# Altium PCB PCB6.PcbDoc
Units mil, origin at the board's own origin, x right, y up, seen from the top; angles counter-clockwise.
Board outline 3899.71 x 3489.7 mil, 2 copper layers (Top Layer, Bottom Layer); 59 components, 49 nets, 212 pads, 44 vias.
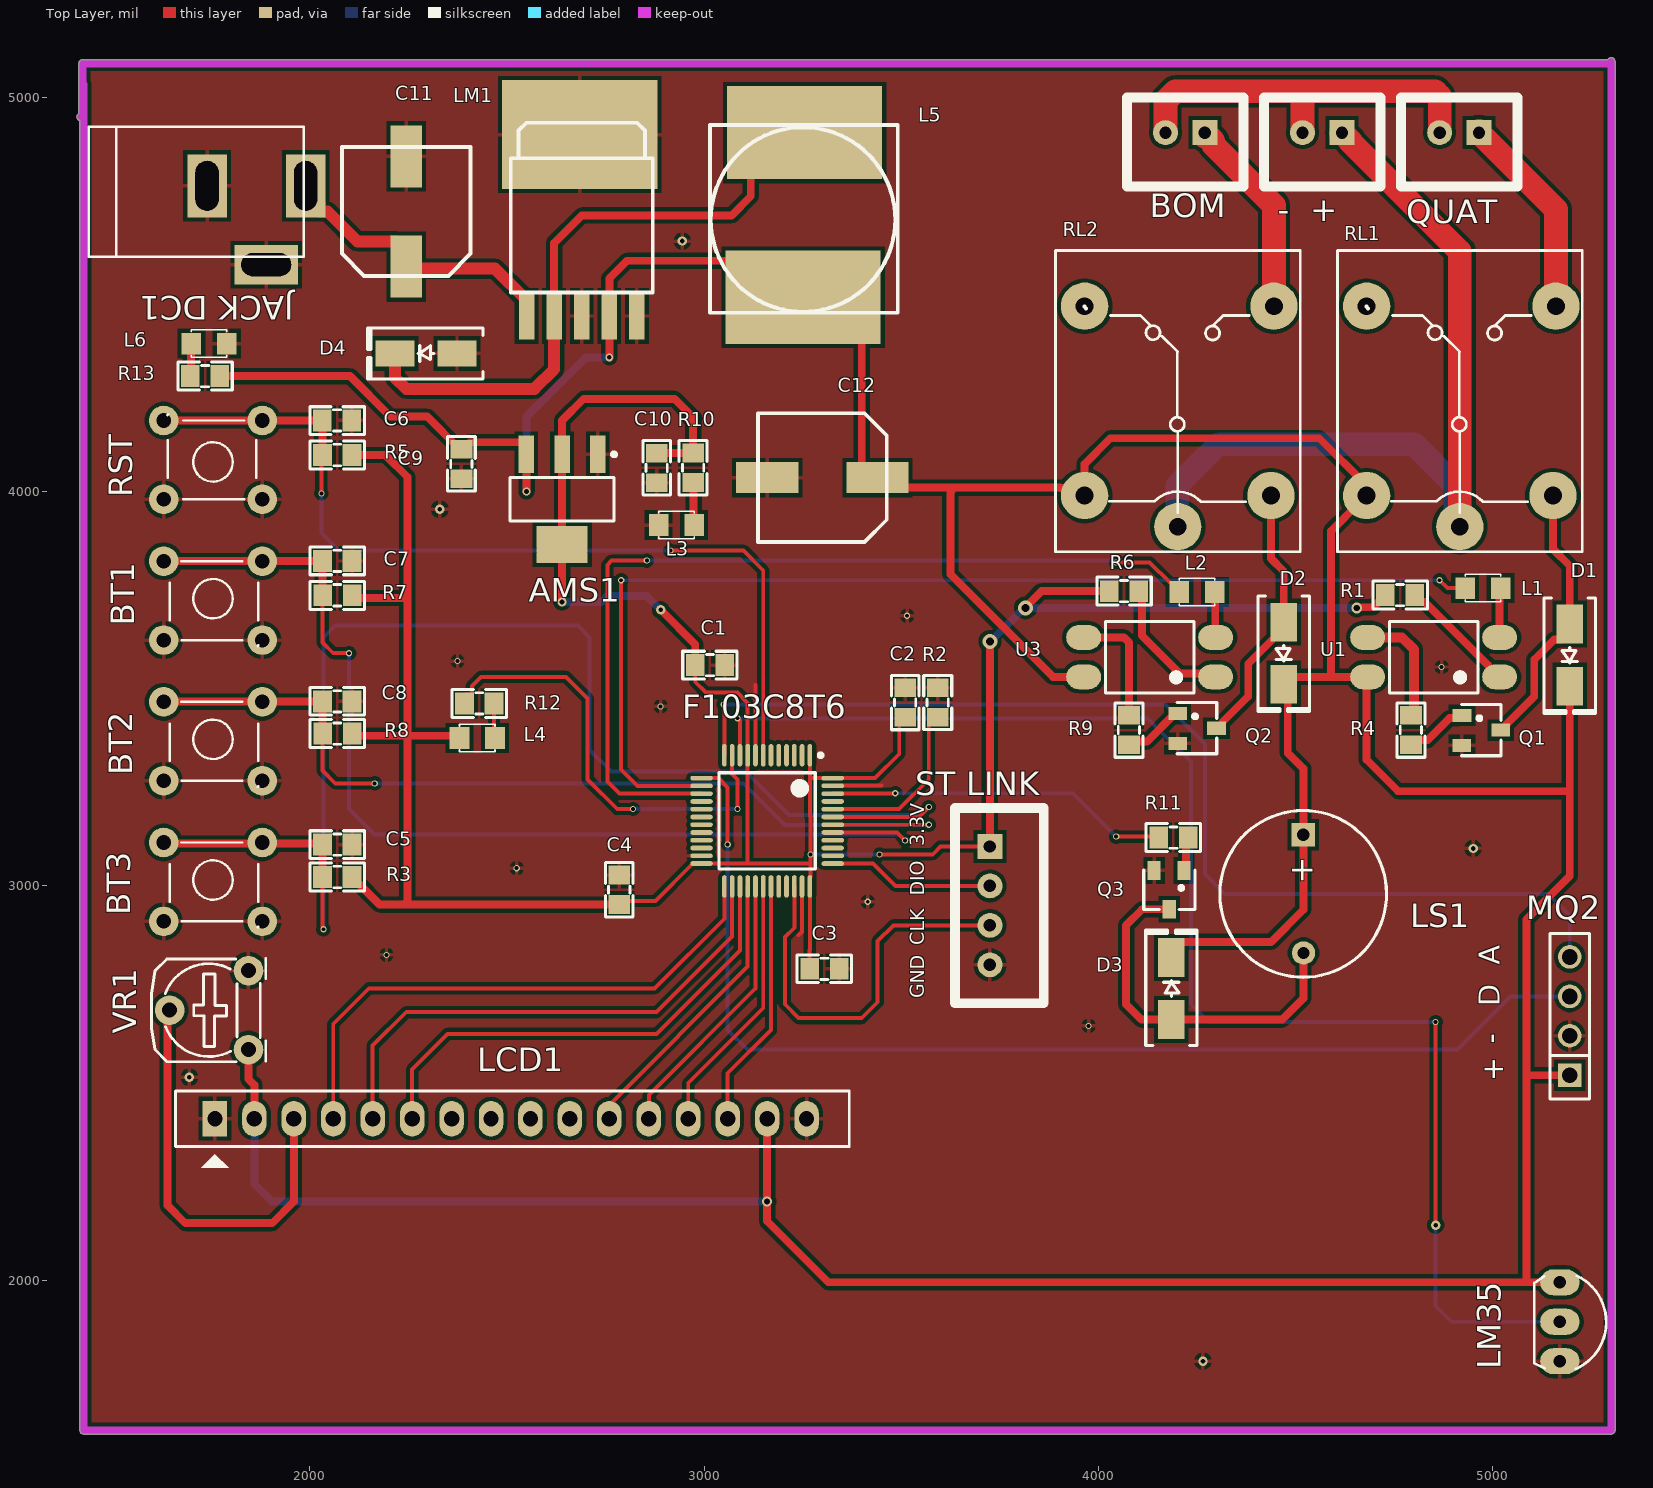
[diagram p0: Top Layer view]
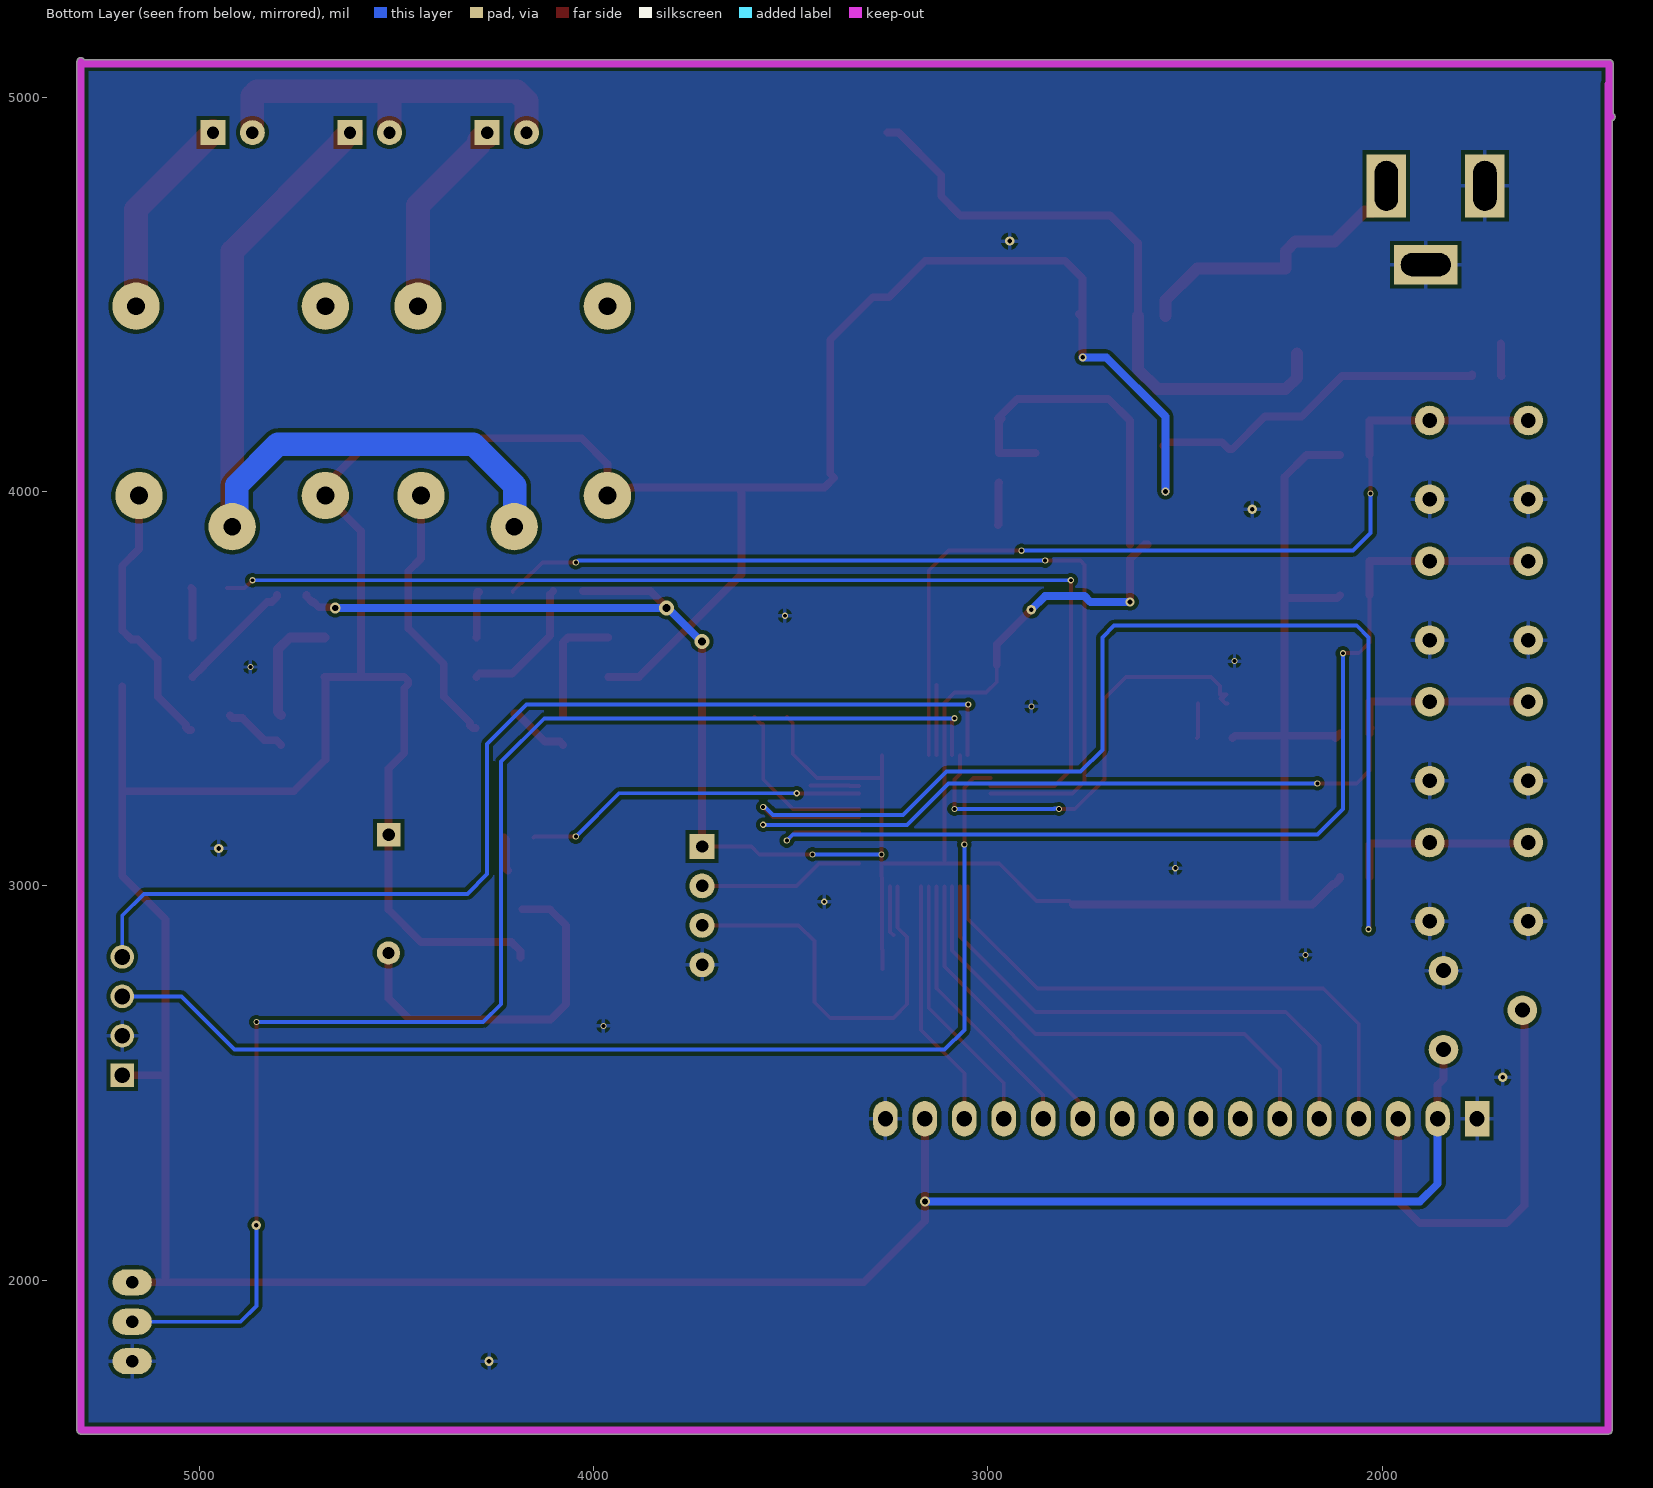
[diagram p1: Bottom Layer view, seen from below]
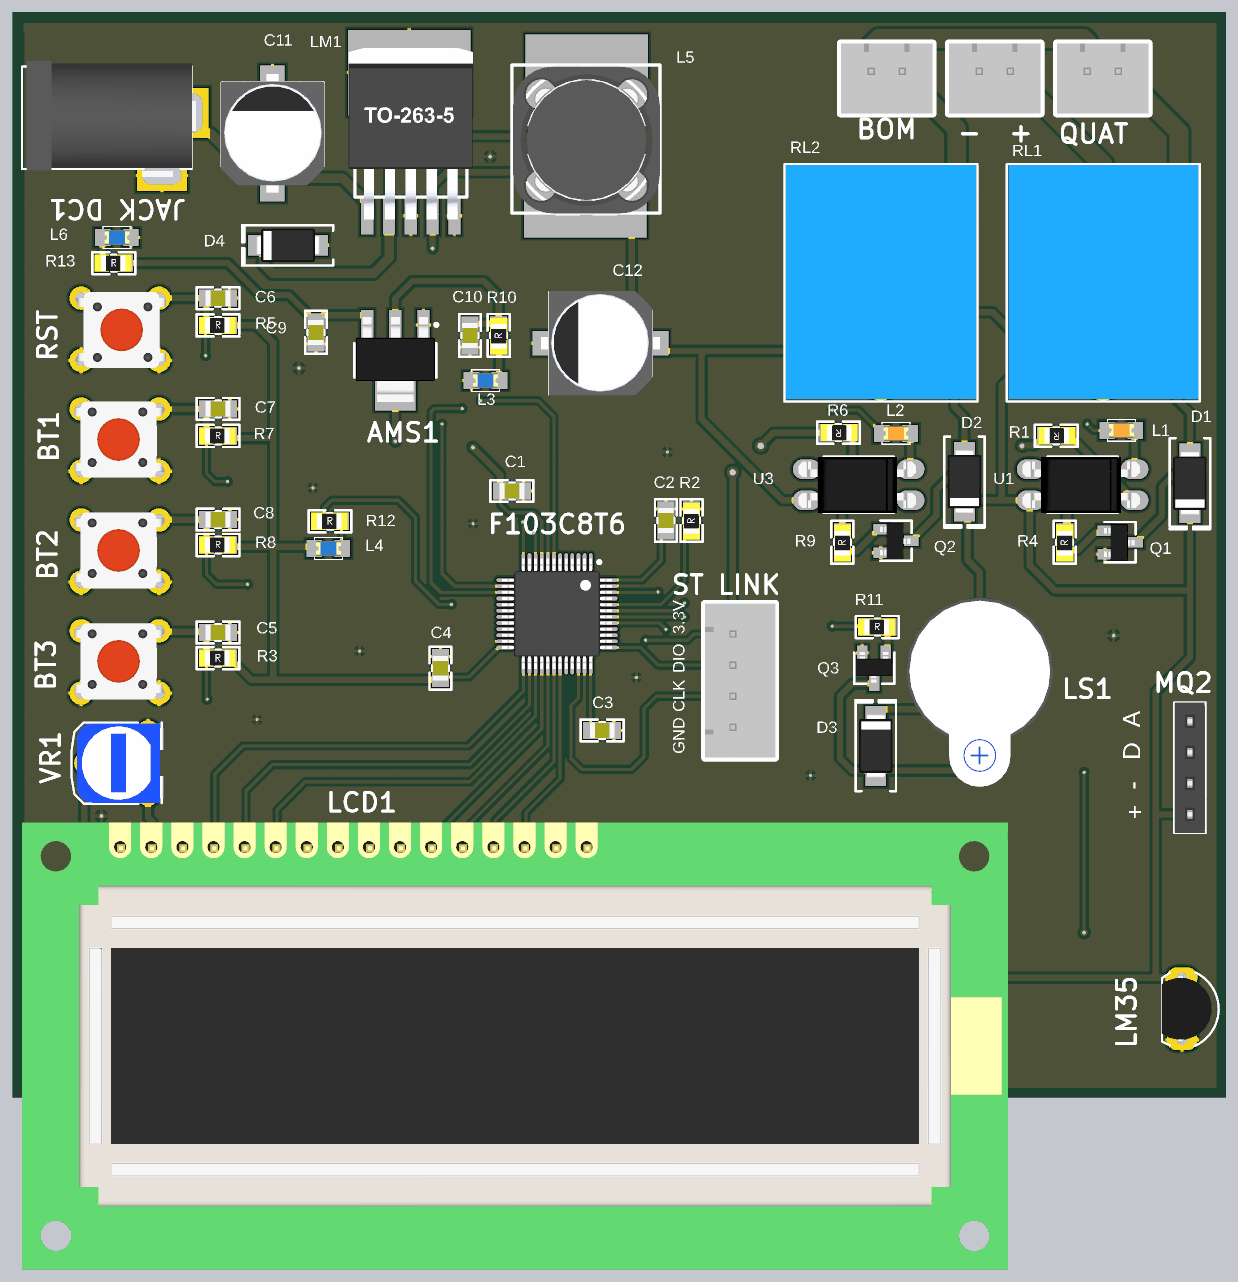
[diagram p2: 3D render of the assembled board from above, using the file's embedded part models]

## Layer stack, top to bottom
Top Solder: solder mask 0.4, Solder Resist, Dk 3.5
Top Layer: signal copper 1.4
Dielectric 1: dielectric 12.6, FR-4, Dk 4.8
Bottom Layer: signal copper 1.4
Bottom Solder: solder mask 0.4, Solder Resist, Dk 3.5

## Board outline
1417.64,4940.43 cw(c1420,4950) 1413.03,4956.97 1415.14,4959.08 1415.14,5085 cw(c1425,5085) 1425,5094.86 5290.92,5094.86 5293.04,5096.98 ccw(c5300,5090) 5293.02,5096.96 5293.03,5096.97 cw(c5300,5090) 5309.86,5090 5309.86,1620 cw(c5300,1620) 5300,1610.14 1427.5,1610.14 cw(c1427.5,1620) 1417.64,1620

## Design rules (kind name [scope] priority, off if disabled: settings)
Clearance [All] p1: gap=9.84 ignorepadtopadclearanceinfootprint=FALSE
PolygonConnect [All] p1: connectstyle=Relief reliefconductorwidth=10 reliefentries=4 polygonreliefangle="90 Angle" airgapwidth=10
RoutingVias [All] p1: holewidth=9.84 width=15.75 viastyle="Through Hole" minholewidth=9.84 minwidth=15.75 maxholewidth=9.84 maxwidth=15.75
SolderMaskExpansion [All] p1: expansion=4 istentingtop=FALSE
Width [All] p1: maxlimit=30 minlimit=10 preferedwidth=20
30 further rules are at their usual default settings.

## Components (designator, comment, footprint, x,y, rotation, side; value= is the part's Value field where it differs from the comment)
"-  +" "Header 2P 2.54 Duc Thang" XH2.54M-2 4617.5,4910 r180 top (schematic designator H7)
AMS1 "AMS1117-3.3V" SOT223 2640,3980 r180 top value="AMS1117-3.3V SOT223"
BOM "Header 2P 2.54 Duc Thang" XH2.54M-2 4270,4910 r180 top (schematic designator H8)
BT1 "SW" SW2-DIP 1630,3823.33 r0 top value="Button chip 4 pin" (schematic designator SW3)
BT2 "SW" SW2-DIP 1630,3466.67 r0 top value="Button chip 4 pin" (schematic designator SW4)
BT3 "SW" SW2-DIP 1630,3110 r0 top value="Button chip 4 pin" (schematic designator SW1)
C1 "104" "tu 0805" 3015,3560 r0 top
C2 "104" "tu 0805" 3510,3465 r90 top
C3 "104" "tu 0805" 3305,2790 r0 top
C4 "104" "tu 0805" 2785,2990 r90 top
C5 "104" "tu 0805" 2070,3105 r0 top
C6 "104" "tu 0805" 2070,4180 r180 top
C7 "104" "tu 0805" 2070,3824 r0 top
C8 "104" "tu 0805" 2070,3468 r0 top
C9 "104" "tu 0805" 2385,4070 r270 top
C10 "104" "tu 0805" 2880,4060 r270 top
C11 "470uF" "tu nhom 8 (f)" 2245,4710 r90 top
C12 "470uF" "tu nhom 8 (f)" 3300,4035 r180 top
D1 "M7" "DIODE SMA" 5195,3585 r270 top
D2 "M7" "DIODE SMA" 4470,3590 r270 top
D3 "M7" "DIODE SMA" 4185,2740 r90 top
D4 "SS34" "DIODE SMA" 2295,4350 r180 top
F103C8T6 "STM32F103xx_LQFP48" STM32_LQPF48 3160,3165 r270 top (schematic designator U2)
"JACK DC1" "JACK DC 5.5" "JACK DC 5.5" 1865,4675 r0 top value="Jac DC"
L1 "LED 0805" LED-0805-Orange 5020,3755 r180 top
L2 "LED 0805" LED-0805-Orange 4295,3745 r180 top
L3 "LED 0805" LED-0805-Blue 2975,3915 r180 top
L4 "LED 0805" LED-0805-Blue 2380,3375 r0 top
L5 "100uH - 3A SMD" "Cuon Cam 12x12x10" 3014.84,4453.31 r0 top
L6 "LED 0805" LED-0805-Blue 1700,4375 r0 top
LCD1 "LCD1602 XL" "LCD1602 with Jump" 1760,2410 r0 top locked
LM1 "LM2576 3.3V SMD" TO263-5 2690,4675 r0 top
LM35 "LM35" QTO-92 5170,1895 r270 top (schematic designator U4)
LS1 "Coi Chip Speaker" "Coi Chip Speacker" 4519.5,3130 r270 top
MQ2 "JP 1x4 2.54" "JP 1x4 CT" 5195,2520 r90 top (schematic designator JP1)
Q1 "HF" SOT-23 4970.79,3395.2 r270 top value=C9014
Q2 "HF" SOT-23 4250,3400 r270 top value=C9014
Q3 "HF" SOT-23 4180,2990 r180 top value=C9014
QUAT "Header 2P 2.54 Duc Thang" XH2.54M-2 4965,4910 r180 top (schematic designator H1)
R1 "1k" "tro smd 0805" 4765,3735 r180 top
R2 "10k" "tro smd 0805" 3590,3465 r90 top
R3 "10k" "tro smd 0805" 2069.9,3025 r0 top
R4 "1k" "tro smd 0805" 4790,3395 r90 top
R5 "10k" "tro smd 0805" 2070,4095 r0 top
R6 "1k" "tro smd 0805" 4065,3745 r180 top
R7 "10k" "tro smd 0805" 2070.1,3739.33 r0 top
R8 "10k" "tro smd 0805" 2070.1,3388.67 r0 top
R9 "1k" "tro smd 0805" 4075,3395 r90 top
R10 "330" "tro smd 0805" 2970,4060.1 r90 top
R11 "1k" "tro smd 0805" 4190,3125 r0 top
R12 "330" "tro smd 0805" 2430,3465 r0 top
R13 "330" "tro smd 0805" 1735,4295 r0 top
RL1 "Relay" "Relay 5 Chan SRD" 4916.22,3910.94 r90 top
RL2 "Relay" "Relay 5 Chan SRD" 4201.22,3910.94 r90 top
RST "SW" SW2-DIP 1880,3980 r180 top value="Button chip 4 pin" (schematic designator SW2)
"ST LINK" "Header 4P 2.54 Duc Thang" XH2.54M-4 3725,3100 r270 top (schematic designator H3)
U1 "OPTO PC817 SMD" SOP4 4850,3580 r180 top value=PC817
U3 "OPTO PC817 SMD" SOP4 4130,3580 r180 top value=PC817
VR1 "10K" "Bien Tro Tam Giac Dung" 1845,2585 r90 top

## Footprints (in the part's own frame and the unit in brackets; to place one, negate y for a bottom-side part, rotate by r counter-clockwise, add the part's x,y. Pads: shape width x height; smd on the part's side, far side on the other; paste and mask are expansions set on the pad)
"Bien Tro Tam Giac Dung" [mil] "RM065"
  round 75 hole 38: 1(0,0) 2(100,200) 3(200,0)
  silkscreen extent -31,-44 231,246, body extent -28,-50 228,228, height 279
"Coi Chip Speacker" [mm]
  rect 1.5x1.5 hole 0.8: 1(0,0)
  round 1.5 hole 0.8: 2(7.62,0.013)
  silkscreen extent -1.55,-5.38 9.18,5.36, body extent -2.22,-6 13.24,6, height 4.5
"Cuon Cam 12x12x10" [mm] "Cuon Cam 12x12x10"
  rect 10x6 smd: 1(6.1,11.6) 2(6,1)
  silkscreen extent 0,0 12.1,12.1, body extent 0.1,-0.2 12.1,12.14, height 7.51
"DIODE SMA" [mm] "SMA"
  rect 2.5x1.7 smd: 1(-2,0) 2(2,0)
  silkscreen extent -3.68,-1.65 3.75,1.65, body extent -2.6,-1.37 2.6,1.37, height 2.4
"JACK DC 5.5" [mil] "Jac DC input"
  rect 100x160 hole 59.06 slot 125.98 at 90 deg: 1(125,100) 2(-125,100)
  rect 160x100 hole 59.06 slot 125.98 at 0 deg: 3(25,-100)
  silkscreen extent -425,-80 120,250, body extent -410,-105 134,269, height 434
"JP 1x4 CT" [mm]
  rect 1.52x1.52 hole 1.02: 1(0,0)
  round 1.52 hole 1.02: 2(2.54,0) 3(5.08,0) 4(7.62,0)
  silkscreen extent -1.52,-1.27 9.14,1.27, body extent -1.52,-1.25 9.14,1.25, height 8.51
"LCD1602 with Jump" [mil] "LCD dipslay 16x2, 16 pin"
  rect 62x90 hole 39: 1(0,0)
  oval 62x90 hole 39: 2(100,0) 3(200,0) 4(300,0) 5(400,0) 6(500,0) 7(600,0) 8(700,0) 9(800,0) 10(900,0) 11(1000,0) 12(1100,0) 13(1200,0) 14(1300,0) 15(1400,0) 16(1500,0)
  silkscreen extent -100,-125 1608,70, body extent -320,-1353 2850,84, height 764
LED-0805-Blue [mil]
  rect 50x55 smd: 1(0,0) 2(90,0)
  silkscreen extent 0,-35 90,35, body extent 5,-25 85,25, height 43
LED-0805-Orange [mil]
  rect 50x55 smd: 1(0,0) 2(90,0)
  silkscreen extent 0,-35 90,35, body extent 5,-25 85,25, height 43
QTO-92 [mil] "TO-92"
  oval 66x100 hole 32: 1(-100,0) 2(0,0) 3(100,0)
  silkscreen extent -117,-65 120,118, body extent -109,-66 109,95, height 245
"Relay 5 Chan SRD" [mil] "Relay SPDT, 5 pin, 10A,W 650mil, L 800mil, H 800mil"
  round 120 hole 45: 1(0,0) 2(559.06,236.22) 3(559.06,-243.78) 4(78.74,-236.22) 5(78.74,236.22)
  silkscreen extent -63,-311 700,310, body extent -55,-306 697,304, height 602
SOP4 [mm]
  oval 2.25x1.6 smd: 1(-4.25,1.27) 2(-4.25,-1.27) 3(4.25,-1.27) 4(4.25,1.27)
  silkscreen extent -2.85,-2.3 2.85,2.3, body extent -4.67,-2.29 4.93,2.31, height 3.6
SOT223 [mm]
  rect 1x2.4 smd: 1(-2.3,-2.9) 2(0,-2.9) 3(2.3,-2.9)
  rect 3.3x2.4 smd: 4(0,2.9)
  silkscreen extent -3.48,-3.02 3.35,1.4, body extent -3.25,-3.56 3.25,3.4, height 1.68
SOT-23 [mm] "SOT 23 _ 1-3-2"
  rect 0.85x1.2 smd: 1(-0.94,-1.245) 2(0.985,-1.25) 3(0.005,1.25)
  silkscreen extent -1.65,-1.27 1.65,1.27, body extent -1.47,-1.33 1.53,1.17, height 1.06
STM32_LQPF48 [mm]
  oval 1.45x0.3 smd: 1(-4.225,2.75) 2(-4.225,2.25) 3(-4.225,1.75) 4(-4.225,1.25) 5(-4.225,0.75) 6(-4.225,0.25) 7(-4.225,-0.25) 8(-4.225,-0.75) 9(-4.225,-1.25) 10(-4.225,-1.75) 11(-4.225,-2.25) 12(-4.225,-2.75) 25(4.225,-2.75) 26(4.225,-2.25) 27(4.225,-1.75) 28(4.225,-1.25) 29(4.225,-0.75) 30(4.225,-0.25) 31(4.225,0.25) 32(4.225,0.75) 33(4.225,1.25) 34(4.225,1.75) 35(4.225,2.25) 36(4.225,2.75)
  oval 0.3x1.45 smd: 13(-2.75,-4.225) 14(-2.25,-4.225) 15(-1.75,-4.225) 16(-1.25,-4.225) 17(-0.75,-4.225) 18(-0.25,-4.225) 19(0.25,-4.225) 20(0.75,-4.225) 21(1.25,-4.225) 22(1.75,-4.225) 23(2.25,-4.225) 24(2.75,-4.225) 37(2.75,4.225) 38(2.25,4.225) 39(1.75,4.225) 40(1.25,4.225) 41(0.75,4.225) 42(0.25,4.225) 43(-0.25,4.225) 44(-0.75,4.225) 45(-1.25,4.225) 46(-1.75,4.225) 47(-2.25,4.225) 48(-2.75,4.225)
  silkscreen extent -4.35,-3.1 3.1,3.58, body extent -4.5,-4.5 4.5,4.5, height 1.6
SW2-DIP [mil] "SW button 4pin, 250 x250 mil"
  round 75 hole 37: 1(0,0) 2(0,-200) 3(250,-200) 4(250,0)
  silkscreen extent 15,-215 240,0, body extent -36,-220 276,24, height 276
TO263-5 [mil] "TO263-5"
  rect 39.37x120 smd: 1(-140,-230) 2(-70,-230) 3(0,-230) 4(70,-230) 5(140,-230)
  rect 393.7x275.59 smd: 6(-5,230)
  silkscreen extent -180,-170 180,260, body extent -200,-242 200,310, height 180
"tro smd 0805" [mm]
  rect 1.2x1.4 smd: 1(-0.946,-0.061) 2(0.954,-0.061)
  silkscreen extent -1.75,-0.97 1.75,0.84, body extent -1.56,-0.76 1.44,0.64, height 0.53
"tu 0805" [mm] "Compoment SMD 80x50mil"
  rect 1.2x1.4 smd: 1(-0.946,-0.003) 2(0.954,-0.003)
  silkscreen extent -1.75,-0.89 1.75,0.89, body extent -1.01,-0.64 1.01,0.63, height 0.61
"tu nhom 8 (f)" [mm]
  rect 4x2 smd: 1(-3.55,0) 2(3.55,0)
  silkscreen extent -4.15,-4.15 4.15,4.15, body extent -4.85,-4.25 4.85,4.25, height 10.5
XH2.54M-2 [mm]
  rect 1.6x1.6 hole 0.8: 1(0,0)
  round 1.6 hole 0.8: 2(2.54,0)
  silkscreen extent -2.48,-2.26 5.02,3.46, body extent -2.48,-2.26 5.02,3.48, height 6.91
XH2.54M-4 [mm]
  rect 1.6x1.6 hole 0.8: 1(0,0)
  round 1.6 hole 0.8: 2(2.54,0) 3(5.08,0) 4(7.62,0)
  silkscreen extent -2.48,-2.26 10.1,3.46, body extent -2.48,-2.26 10.1,3.48, height 6.91

## Part data
"-  +" BOM QUAT "ST LINK": "Cắm", Chung_Loai=Cắm, Don_Vi=Con
  "-  +" BOM QUAT: Ma_Hang=MH001283, Ten_Linh_Kien="Header 2P XH2.54-2P Đực Thẳng"
  "ST LINK": Ma_Hang=MH001285, Ten_Linh_Kien="Header 4P XH2.54-4P Đực Thẳng"
AMS1: library part "AMS1117 SMD", "Dán", Chung_Loai=Dán, Don_Vi=Con, Ma_Hang=MH000596
BT1 BT2 BT3 RST: library part SW4, "Switch button 4 pin"
C1 C2 C3 C4 C5 C6 C7 C8 C9 C10: library part "Tu 0805 104 50V 10%", "Dán", Chung_Loai=Dán, Don_Vi=Con, Ma_Hang=MH004551, So_Chan=2, Ten_Linh_Kien="Tụ 0805 104-100nF 10% 50V"
C11 C12: library part "Tu Nhom 470uF 16V", "Dán", Chung_Loai=Dán, Don_Vi=Con, Ma_Hang=MH001940, So_Chan=2, Ten_Linh_Kien="Tụ Nhôm 470uF 16V 8x10.4MM"
D1 D2 D3: library part "Diode M7 ( 4007 )", "Dán", Chung_Loai=Dán, Don_Vi=Con, Ma_Hang=MH000944, Ten_Linh_Kien="Diode M7 1N4007 SMD 1A 1000V"
D4: library part "Diode SS34 ( 1N5822 )", "Dán", Chung_Loai=Dán, Don_Vi=Con, Ma_Hang=MH002104, Ten_Linh_Kien="Diode SS34 3A 40V SMA ( 1N5822 SS34A)"
L1 L2: library part "LED 0805 Cam", "Dán", Chung_Loai=Dán, Don_Vi=Con, Ma_Hang=MH002328, Ten_Linh_Kien="LED 0805 Màu Cam ( Orange)"
L3 L4 L6: library part "LED 0805 Xanh Duong", "Dán", Chung_Loai=Dán, Don_Vi=Con, Ma_Hang=MH002327, Ten_Linh_Kien="LED 0805 Màu Xanh Dương (Blue)"
L5: library part "CUON CAM 100uH SMD", "Dán", Chung_Loai=Dán, Don_Vi=Con, Ten_Linh_Kien="Cuộn Cảm 100uH 7x7x4MM CD74"
LCD1: "LCD 1602 Xanh Lá", CHIP=HD44780, Ma_Hang=67HZ, NCC=NSHOP, Ten="Màn hình LCD 1602 Xanh Lá"
LM1: "Dán", Chung_Loai=Dán, Don_Vi=Con, Ma_Hang=MH001260, Ten_Linh_Kien="LM2576S-3.3V BUCK 3.3V 3A TO263-5"
LM35: "Teminal"
LS1: "Còi chip"
MQ2: library part "JP 1x4 2.54 Cai Thang", "Cắm", Chung_Loai=Cắm, Don_Vi=Con, Ma_Hang=MH004006, Ten_Linh_Kien="Jump Đơn Cái 2.54MM 1x20P Thẳng"
Q1 Q2 Q3: library part "Trans C1815 HF SMD", "SOT-23"
R1 R4 R6 R9: library part "Tro 0805 1% 1k", "Dán", Chung_Loai=Dán, Don_Vi=Con, Ma_Hang=MH005468, So_Chan=2, Ten_Linh_Kien="Trở 0805 1% 1k"
R2 R3 R5 R7 R8 R10 R11 R12 R13: library part "Tro 0805 1% 18k", "Dán", Chung_Loai=Dán, Don_Vi=Con, Ma_Hang=MH005477, So_Chan=2, Ten_Linh_Kien="Trở 0805 1% 18k"
RL1 RL2: library part "Relay 5 Chan SRD", "Relay 5 Chan", Ma_Hang=MH009374, Ten="Relay 5V10A SRD-05VDC-SL-C Chính Hãng"
U1 U3: "Single Opto"
VR1: library part "Bien tro tam giac 10K Dung", "Cắm", Chung_Loai=Cắm, Don_Vi=Con, Ma_Hang=MH000919, Ten_Linh_Kien="Biến Trở Tam Giác 103-10K RM065 (Chân Đứng)"
F103C8T6: ComponentLink1Description="Manufacturer Link", ComponentLink1URL=www.st.com/stm32, ComponentLink2Description=Datasheet, ComponentLink2URL=http://www.st.com/stonline/products/literature/ds/13587.pdf, DatasheetVersion="rev6, Mar-2008", PackageDescription="48-Pin Low-Profile Quad Flat Pack, 7 x 7 mm Body, 0.5 mm Pitch (LQFP48)", PackageReference=LQFP48, PackageVersion=Mar-2008, Published=30-May-2008, Publisher="Altium Limited"

## Via types
v1: diameter 15.75, hole 9.84, Top Layer to Bottom Layer, tented top, 30 vias
v2: diameter 23.62, hole 11.81, Top Layer to Bottom Layer, tented top, 8 vias
v3: diameter 19.68, hole 11.81, Top Layer to Bottom Layer, tented top, 2 vias
v4: diameter 37.75, hole 20, Top Layer to Bottom Layer, tented top, 1 vias
v5: diameter 27.56, hole 15.75, Top Layer to Bottom Layer, tented top, 1 vias
v6: diameter 37.75, hole 20.84, Top Layer to Bottom Layer, tented top, 1 vias
v7: diameter 25.75, hole 15.84, Top Layer to Bottom Layer, tented top, 1 vias

## Nets (pads, with @x,y where several pads share a name; then routed paths per layer and width w, separated by ;. In a path a pad name is that pad's centre, name@x,y a point inside that pad or via, vN(x,y) a via of type N, cw(c..) or ccw(c..) an arc to the next point about the centre after c; other vN are vias at no path point)
+3.3V: "ST LINK.1" AMS1.2 AMS1.4 C1.1 C2.1 C3.1 C4.1 C10.1 F103C8T6.1 F103C8T6.9 F103C8T6.24 F103C8T6.36 F103C8T6.48 L4.1 R1.2 R3.2 R5.2 R6.2 R7.2 R8.2 R10.2 | length 8184.1
  Top Layer w10: C4.1@2784.78,2952.77 2793.84,2961.84 2876.84,2961.84 2970.12,3055.12 2970.12,3055.34 2971.51,3056.73 3115,3056.73 ; C1.1 2977.77,3517.23 3005,3490 3085,3490 3110.79,3464.21 F103C8T6.9 3110.79,3060.94 3115,3056.73 ; C3.1 3267.77,2837.77 3268.27,2838.27 3268.27,3021.79 3270,3023.52 3270,3055.87 3269.14,3056.73 3115,3056.73 ; F103C8T6.1 3268.27,3325.84 3269.1,3325 3268.27,3324.16 3268.27,3275 ; 3270,3056.73 v1(3270,3080) 3270,3174.91 3268.27,3176.64 3268.27,3275 ; v1(3445,3080) 3580,3080 3600,3100 3725,3100 3725,3105 ; C2.1 3495,3412.64 3495,3335 3433.27,3273.27 F103C8T6.48 3270,3273.27 3268.27,3275
  Top Layer w20: R3.2 2107.47,3018.67 2121.09,3005.05 2125.03,3005.05 2177.31,2952.77 2240,2952.77 ; R5.2 2192.39,4092.61 2247.83,4037.17 2247.83,3730 ; R8.2 2118.95,3375 2118.95,3378.29 2121.3,3380.64 2247.83,3380.64 ; R7.2 2114.62,3730 2247.83,3730 ; L4.1 2374.36,3380.64 2247.83,3380.64 ; AMS1.4@2595,3865.83 2602.76,3865.83 2640,3828.58 v2(2640,3720) ; AMS1.4 AMS1.2 2640,4180 2695,4235 2925,4235 2975,4185 ; C4.1@2784.78,2952.77 2240,2952.77 ; C10.1 2880.09,4097.45 2972.17,4097.45 R10.2 2972.39,4182.61 2967.39,4182.61 2965,4185 ; v2(2890,3700) 2977.77,3612.23 C1.1 ; 3725,3105 v4(3725,3620) ; v6(3815,3705) 3815,3706.53 3855.87,3747.39 R6.2 ; v5(4655,3705) 4656.45,3706.45 4696.48,3706.45 4709.87,3719.83 4713.8,3719.83 4727.43,3733.46 R1.2 ; 2240,2952.77 2247.83,2960.6 2247.83,3380.64 ; 2247.83,3380.64 2247.83,3730
  Bottom Layer w10: v1(3270,3080) v1(3445,3080) ; 3725,3100 3730,3100
  Bottom Layer w20: v2(2640,3720) 2740.49,3720 2755.49,3735 2855,3735 v2(2890,3700) ; v4(3725,3620) 3727.5,3620 3812.5,3705 v5(4655,3705)
+5: AMS1.3 C9.1 C12.1 D1.2 D2.2 D3.2 L5.2 LCD1.2 LCD1.15 LM1.4 LM35.1 LS1.1 MQ2.1 R13.2 RL1.5 RL2.5 U1.4 U3.4 VR1.1 | length 13083.9
  Top Layer w10: RL2.5 RL2.5@3965,3990
  Top Layer w20: R13.2 1772.57,4297.43 1777.39,4292.61 2102.39,4292.61 2202.77,4192.23 ; VR1.1@1845,2590.63 VR1.1 1845,2510.12 1860,2495.12 LCD1.2 LCD1.2@1860,2400 ; 2205,4190 2298.16,4190 2380.8,4107.36 2385,4107.36 C9.1 2388.8,4107.23 2406.57,4125 AMS1.3@2546.85,4125 ; v3(2550,4000) 2550,4111.09 AMS1.3@2555,4116.09 ; v3(2760,4340) LM1.4@2760,4440 ; LM1.4@2770,4450 LM1.4@2760,4440 ; LCD1.15@3160,2408.39 v7(3160,2200) 3160,2150 3315,1995 5085,1995 ; 3625,4005 3630,4010 ; 3628.24,4001.76 3624.76,3998.28 3624.76,3790.24 3885,3530 U3.4 ; RL2.5 3945.87,4008.82 3904.47,4008.82 3903.28,4010 3630,4010 ; RL2.5@3965,3990 3965,4070 4030,4135 4560,4135 4680,4015 RL1.5@4680,3995 ; D3.2 4185,2834.49 4208.46,2857.95 4437.95,2857.95 4519.5,2939.5 LS1.1 4519.5,3297.77 4480,3337.27 4480,3501.26 D2.2 4470,3520 4480,3530 4590,3530 ; RL1.5 RL1.5@4680,3995 ; U1.4 U1.4@4680,3530 ; LM35.1 5085,1995 ; MQ2.1 5085,2520 ; D1.2 5195,3240 ; LM1.4@2760,4440 LM1.4 2760,4540 2805,4585 3158.74,4585 L5.2 3291.89,4492.68 3400,4384.57 3400,4045.24 3389.76,4035 3414.76,4010 3630,4010 ; 4590,3530 U1.4@4680,3530 ; 4590,3530 4590,3899.68 4665.31,3975 4670,3975 4670,4005 RL1.5@4680,3995 ; U1.4@4680,3530 4680,3320 4760,3240 5195,3240 ; 5085,1995 5085,2520 ; 5085,2520 5085,2915 5195,3025 5195,3240
  Bottom Layer w20: LCD1.2 1860,2245 1905,2200 v7(3160,2200) ; v3(2550,4000) 2550,4190 2700,4340 v3(2760,4340)
Analog: F103C8T6.12 MQ2.4 | length 2794.3
  Top Layer w10: v1(3050,3460) 3050,3458.44 3051.73,3456.71 F103C8T6.12
  Bottom Layer w10: v1(3050,3460) 4170,3460 4270,3360 4270,3030 4320,2980 5140,2980 5195,2925 MQ2.4
BOM: F103C8T6.15 L2.2 | length 2289.8
  Top Layer w10: v1(2855,3825) 2765.86,3825 2755,3814.14 2755,3265 2786.1,3233.9 F103C8T6.15 ; v1(4045,3820) 4130,3820 4182.5,3767.5 4185,3767.5 4205,3747.5 L2.2
  Bottom Layer w10: v1(2855,3825) 4038.44,3825 4043.44,3820 v1(4045,3820)
Button1: BT3.1 BT3.4 C5.1 F103C8T6.43 R3.1 | length 3536.3
  Top Layer w10: R3.1 2032.67,2893.89 2035,2891.56 v1(2035,2890) ; F103C8T6.43 3544.84,3174.84 v1(3570,3200)
  Top Layer w20: BT3.1 1632.57,3107.43 2030.2,3107.43 C5.1 2032.72,3104.81 2032.72,3022.66 R3.1
  Bottom Layer w10: v1(2035,2890) 2035,3630 2065,3660 2680,3660 2710,3630 2710,3345 2765,3290 3105,3290 3215,3180 3545,3180 3565,3200 v1(3570,3200)
Button2: BT2.1 BT2.4 C8.1 F103C8T6.42 R8.1 | length 2419
  Top Layer w10: R8.1 2032.87,3292.13 2065,3260 v1(2165,3260) ; F103C8T6.42 3326.42,3155.08 3569.92,3155.08 v1(3570,3155)
  Top Layer w20: BT2.1 1630.6,3467.27 2032.17,3467.27 C8.1 2032.82,3467.81 2032.82,3402.82 2030,3400 2032.87,3397.13 R8.1
  Bottom Layer w10: v1(2165,3260) 3100,3260 3205,3155 v1(3570,3155)
BUTTON3: BT1.1 BT1.4 C7.1 F103C8T6.41 R7.1 | length 2718.4
  Top Layer w10: R7.1 2032.87,3617.13 2060,3590 v1(2100,3590) ; F103C8T6.41 3489.53,3135.47 v1(3510,3115)
  Top Layer w20: BT1.1 1630.27,3823.6 2032.51,3823.6 C7.1 2032.87,3823.76 R7.1
  Bottom Layer w10: v1(2100,3590) 2100,3195 2165,3130 3495,3130 v1(3510,3115)
Buzzer: F103C8T6.46 R11.1 | length 873.4
  Top Layer w10: F103C8T6.46 3483.9,3233.9 v1(3485,3235) ; v1(4045,3125) 4150.38,3125 R11.1
  Bottom Layer w10: v1(3485,3235) 3935,3235 v1(4045,3125)
D4: F103C8T6.28 LCD1.11 | length 734
  Top Layer w10: LCD1.11 2760,2445 3110.79,2795.79 F103C8T6.28
D5: F103C8T6.29 LCD1.12 | length 700.2
  Top Layer w10: LCD1.12@2860.33,2410.33 2860.33,2470.33 3130.47,2740.47 F103C8T6.29
D6: F103C8T6.30 LCD1.13 | length 667.4
  Top Layer w10: LCD1.13 2960,2500 3150.16,2690.16 F103C8T6.30
D7: F103C8T6.31 LCD1.14 | length 629.2
  Top Layer w10: LCD1.14@3060,2415 3060,2525 3169.84,2634.84 F103C8T6.31
Digital: F103C8T6.13 MQ2.3 | length 2902.6
  Top Layer w10: F103C8T6.13 3036.73,3273.27 3060,3250 v1(3060,3105)
  Bottom Layer w10: v1(3060,3105) 3060,2635 3110,2585 4910,2585 5045,2720 MQ2.3
EN: F103C8T6.27 LCD1.6 | length 1243.4
  Top Layer w10: LCD1.6 2260,2535 2350,2625 2880,2625 3091.1,2836.1 F103C8T6.27
GND: "JACK DC1.2" "JACK DC1.3" "ST LINK.4" AMS1.1 BT1.2 BT1.3 BT2.2 BT2.3 BT3.2 BT3.3 C1.2 C2.2 C3.2 C4.2 C5.2 C6.1 C7.2 C8.2 C9.2 C10.2 C11.2 C12.2 D4.1 F103C8T6.8 F103C8T6.23 F103C8T6.35 F103C8T6.47 L3.2 L6.2 LCD1.1 LCD1.16 LM1.3 LM1.5 LM1.6 LM35.3 MQ2.2 Q1.2 Q2.2 Q3.2 R2.2 RST.1 RST.4 VR1.3 | length 430.3
  Top Layer w10: 3130,3510 3130.47,3509.53 F103C8T6.8 ; 3240,2875 3248.58,2883.58 F103C8T6.35 ; F103C8T6.47 3349.47,3253.58 3350.88,3255 3450,3255
  other v1: 3975,2645 2195,2825 3415,2960 2525,3045 2890,3455 4870,3555 2375,3570 3515,3685
  other v2: 4265,1795 1695,2515 4950,3095 2330,3955 2945,4635
LED2: F103C8T6.11 R12.1 | length 1164.3
  Top Layer w10: R12.1 2397.39,3462.61 2410,3475.21 2404.95,3475.21 2395,3485.17 2411.39,3485.17 2411.39,3506.39 2435,3530 2650,3530 2705,3475 2705,3270 2780,3195 v1(2820,3195) ; F103C8T6.11 3071.42,3283.58 3085,3270 v1(3085,3195)
  Bottom Layer w10: v1(2820,3195) 2821.1,3196.1 2831.1,3196.1 2832.2,3195 v1(3085,3195)
LM35: F103C8T6.10 LM35.2 | length 3604
  Top Layer w10: v1(3085,3425) 3091.1,3418.9 F103C8T6.10 ; v2(4855,2140) v1(4855,2655)
  Top Layer w20: LM35.2@5165,1900 LM35.2
  Bottom Layer w10: v1(3085,3425) 4125,3425 4235,3315 4235,2700 4280,2655 v1(4855,2655) ; v2(4855,2140) 4855,1935 4895,1895 LM35.2@5155,1895
  Bottom Layer w20: LM35.2@5155,1895 LM35.2
MASS: "-  +.2" BOM.2 QUAT.2 | length 991.2
  Top Layer w60: BOM.2 4170,4990 4195,5015 4524.14,5015 ; 4517.5,4910 4517.5,5008.36 4524.14,5015 ; QUAT.2 4865,5003.28 4853.28,5015 4524.14,5015
NetC11_1: "JACK DC1.1" C11.1 LM1.1 | length 770
  Top Layer w20: 1990,4775 2000,4775
  Top Layer w30: 2000,4775 2000,4755 2025,4730 2025,4710 2045,4710 2121.02,4633.98 2220.63,4633.98 2245,4609.61 C11.1 C11.1@2245,4565.24 ; C11.1@2245,4565 C11.1@2245,4565.24 ; LM1.1 2550,4485.31 2470.08,4565.24 C11.1@2245,4565.24
NetD1_1: D1.1 Q1.3 RL1.4 | length 698.1
  Top Layer w20: Q1.3 5026.89,3395 5033.62,3401.73 5033.62,3408.62 5105,3480 5105,3573.74 5155.79,3624.53 5171.54,3624.53 5195,3647.99 D1.1 5195,3811.51 5152.44,3854.07 RL1.4
NetD2_1: D2.1 Q2.3 RL2.4 | length 680.4
  Top Layer w20: Q2.3 4299.41,3400 4306.3,3400 4312.84,3406.53 4312.84,3413.42 4380,3480.59 4380,3562.99 4470,3652.99 4470,3797.71 4437.44,3830.27 RL2.4
  Bottom Layer w20: RL2.4 RL2.4@4439.69,3989.68
NetD3_1: D3.1 LS1.2 Q3.3 | length 930
  Top Layer w20: Q3.3 4110.79,2940.79 4070,2900 4070,2700 4108.74,2661.26 D3.1 4466.26,2661.26 4520,2715 LS1.2
NetD4_2: D4.2 L5.1 LM1.2 | length 1599.8
  Top Layer w20: LM1.2 2620,4630 2690,4700 3070,4700 3118.61,4748.61 3118.61,4801.89 3226.72,4910 L5.1
  Top Layer w30: D4.2 2216.26,4288.74 2245,4260 2570,4260 2620,4310 LM1.2
NetH1_1: QUAT.1 RL1.3 | length 525.8
  Top Layer w60: QUAT.1@4965,4915 QUAT.1 5160,4715 RL1.3
NetH2_2: 
NetH3_2: "ST LINK.2" F103C8T6.37 | length 422.2
  Top Layer w10: F103C8T6.37 3428.27,3056.73 3485,3000 3725,3000
NetH3_3: "ST LINK.3" F103C8T6.34 | length 1031.2
  Top Layer w10: F103C8T6.34 3228.9,2893.9 3205,2870 3205,2700 3240,2665 3400,2665 3440,2705 3440,2860 3480,2900 3725,2900
NetH5_1: 
NetH5_2: 
NetH8_1: BOM.1 RL2.3 | length 518.3
  Top Layer w60: BOM.1 4270,4900 4280,4900 4291.5,4888.5 4291.5,4878.5 4445,4725 RL2.3
NetL1_1: L1.1 U1.2 | length 126.1
  Top Layer w20: U1.2 5017.32,3752.32 L1.1
NetL2_1: L2.1 U3.2 | length 123
  Top Layer w20: L2.1 4290,3745 4296.16,3738.84 4296.16,3631.16 U3.2
NetL3_1: L3.1 R10.1 | length 109
  Top Layer w20: R10.1 2973.7,4021.57 2973.7,3916.3 L3.1
NetL4_2: L4.2 R12.2 | length 88.6
  Top Layer w10: R12.2 2467.57,3377.43 L4.2
NetL6_1: L6.1 R13.1 | length 83.3
  Top Layer w20: R13.1 1698.89,4293.72 1698.89,4373.89 L6.1
NetLCD1_3: LCD1.3 VR1.2 | length 1079.4
  Top Layer w20: VR1.2@1640,2688.9 1640,2190 1685,2145 1905,2145 1960,2200 LCD1.3@1960,2419.05
NetQ1_1: Q1.1 R4.1 | length 160.2
  Top Layer w20: R4.1 4804.01,3369.39 4834.39,3369.39 4890.47,3425.47 4915.05,3425.47 Q1.1
NetQ2_1: Q2.1 R9.1 | length 156.4
  Top Layer w20: R9.1 4085.45,3365.83 4122.94,3365.83 4194.11,3437 Q2.1
NetQ3_1: Q3.1 R11.2 | length 88
  Top Layer w20: Q3.1 4222.29,3044.29 4222.29,3117.32 R11.2
NetR1_1: R1.1 U1.1 | length 304
  Top Layer w20: R1.1 4802.23,3733.46 4815.85,3719.83 4827.49,3719.83 4987.44,3559.88 4987.44,3558.72 5016.16,3530 U1.1
NetR2_1: F103C8T6.44 R2.1 | length 444.3
  Top Layer w10: F103C8T6.44 3494.53,3194.53 3569.83,3269.83 3569.83,3409.15 3571.06,3410.38 3575,3410.38 R2.1
NetR4_2: R4.2 U1.3 | length 300.3
  Top Layer w25: U1.3 4770,3630 4800,3600 4800,3440.18 R4.2
NetR6_1: R6.1 U3.1 | length 346.4
  Top Layer w20: R6.1 4110,3739.62 4110,3635 4206.77,3538.23 4289.1,3538.23 U3.1
NetR9_2: R9.2 U3.3 | length 304.9
  Top Layer w20: U3.3 4065,3630 4077.39,3617.61 R9.2
QUAT: F103C8T6.14 L1.2 | length 2849.1
  Top Layer w10: v1(2790,3775) 2790,3295 2831.42,3253.58 F103C8T6.14 ; v1(4865,3775) 4885,3755 L1.2
  Bottom Layer w10: v1(2790,3775) v1(4865,3775)
R/W: F103C8T6.26 LCD1.5 | length 1338.2
  Top Layer w10: LCD1.5 2160,2595 2245,2680 2880,2680 3071.42,2871.42 F103C8T6.26
RS: F103C8T6.25 LCD1.4 | length 1424.1
  Top Layer w10: LCD1.4 2060,2650 2150,2740 2875,2740 3051.73,2916.73 F103C8T6.25
RST: C6.2 F103C8T6.7 R5.1 RST.2 RST.3 | length 2317
  Top Layer w10: v1(2030,3995) 2030,4089.83 R5.1 ; v1(2915,3850) 3100,3850 3150.16,3799.84 F103C8T6.7
  Top Layer w20: RST.3 RST.2 1880.07,4180.07 C6.2 C6.2 2032.6,4179.96 2032.6,4092.78 R5.1
  Bottom Layer w10: v1(2030,3995) 2030,3895 2075,3850 v1(2915,3850)
VCC: "-  +.1" RL1.1 RL2.1 | length 2132.6
  Top Layer w60: 4615,4910 4617.5,4910 4639,4888.5 4639,4886 4916.22,4608.78 RL1.1
  Bottom Layer w60: RL2.1 4199.06,3910.94 4200,3911.89 4200,4015 4305,4120 4800,4120 4904.74,4015.26 4904.74,3922.43 RL1.1
pads on no net: F103C8T6.2 F103C8T6.3 F103C8T6.4 F103C8T6.5 F103C8T6.6 F103C8T6.16 F103C8T6.17 F103C8T6.18 F103C8T6.19 F103C8T6.20 F103C8T6.21 F103C8T6.22 F103C8T6.32 F103C8T6.33 F103C8T6.38 F103C8T6.39 F103C8T6.40 F103C8T6.45 LCD1.7 LCD1.8 LCD1.9 LCD1.10 RL1.2 RL2.2

## Polygon pours and split planes (outlines as drawn)
GND on Top Layer "GND_L01_P000" (solid, pour order 0): 1425,5085 1420,5080 1420,1615 1425,1620 5295,1620 5300,1625 5300,5090 5295,5085 1420,5085
GND on Bottom Layer "GND_L02_P001" (solid, pour order 1): 1425,1615 5300,1615 5305,1620 5305,5085 1425,5085

## Keep-outs
Keep-Out Layer:
  lines w19.68: 1420,4950 1425,4955 1425,5085 5295,5085 5300,5090 5300,1620 1427.5,1620 1427.5,5032.5

## Silkscreen, mask and mechanical layers (free items; w line width, h text height)
Top Overlay:
  text "3.3V" at 3569.33,3100 h60 r90
  text "DIO" at 3569.33,2975 h60 r90
  text "CLK" at 3569.33,2850 h60 r90
  text "A" at 5035,2800 h90 r90
  text "GND" at 3569.33,2715 h60 r90
  text "D" at 5035,2695 h90 r90
  text "-" at 5037.33,2600 h90 r90
  text "+" at 5044.33,2505 h90 r90

## Text inside footprints (layer, text, board x,y; h text height)
LS1: Top Overlay "+" at 4491.5,3074.5 h60 r270